# Altium PCB MAINBOARD.PCBDOC
Units mm, origin at the board's own origin, x right, y up, seen from the top; angles counter-clockwise.
Board outline 295.53 x 164.72 mm, 2 copper layers (Top Layer, Bottom Layer); 59 components, 67 nets, 270 pads, 42 vias.
Unrouted connection lines stored in the file: 7.
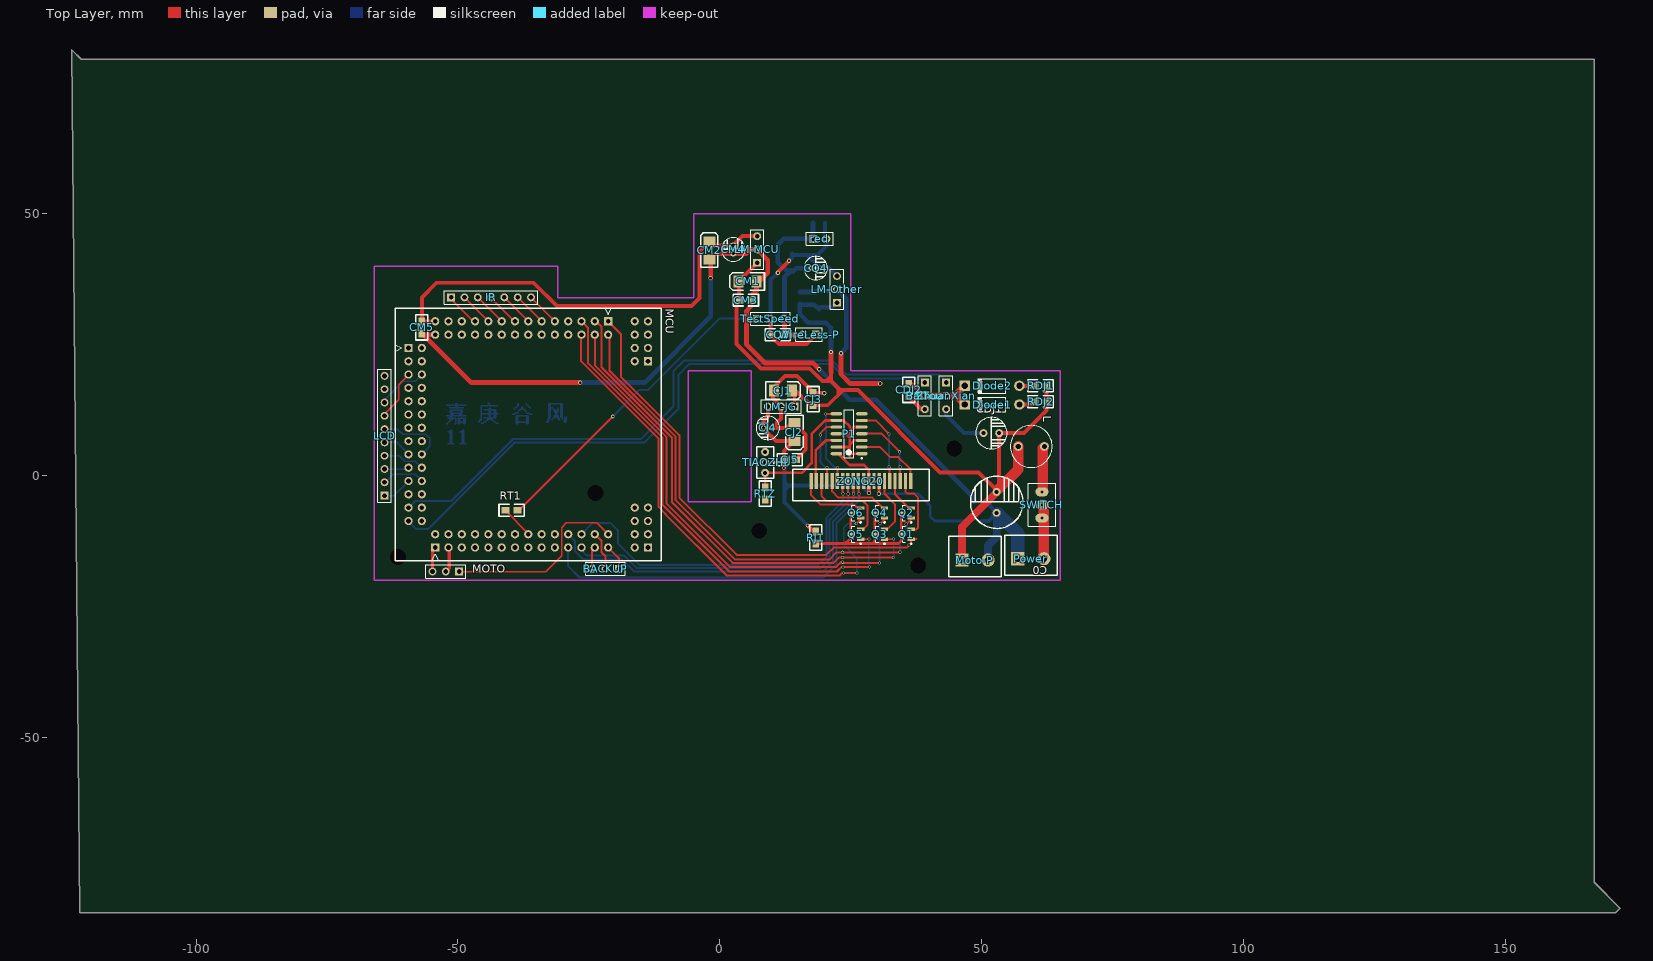
[diagram p0: Top Layer view]
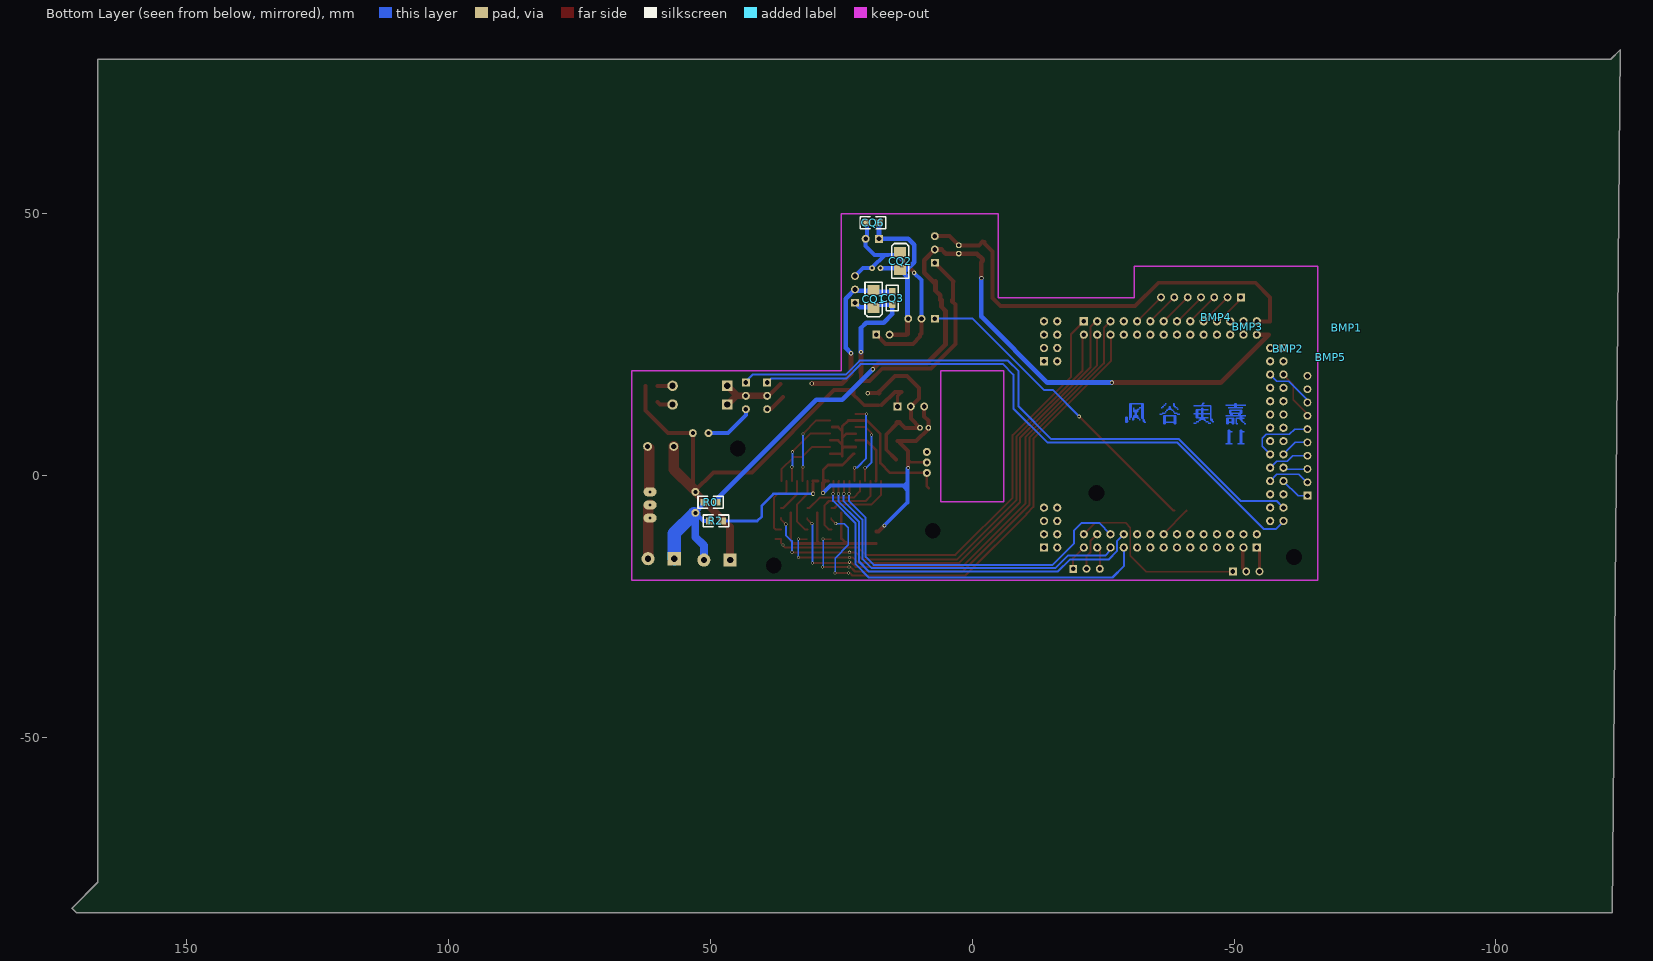
[diagram p1: Bottom Layer view, seen from below]

## Layer stack, top to bottom
Top Layer: signal copper 0.0356
Dielectric: dielectric 0.32, FR-4, Dk 4.8
Bottom Layer: signal copper 0.0356

## Board outline
-122.174,-83.439 170.942,-83.439 171.831,-82.55 166.878,-77.597 166.878,79.502 -121.92,79.502 -123.698,81.28

## Design rules (kind name [scope] priority, off if disabled: settings)
Clearance [All] p1: gap=0.254
ComponentClearance [All] p1 off: gap=0.254 collisioncheckmode=3 verticalgap=0.254
PolygonConnect [All] p1: connectstyle=Relief reliefconductorwidth=0.254 reliefentries=4 polygonreliefangle="90 Angle"
RoutingVias [All] p1: holewidth=0.711 width=1.27 viastyle="Through Hole" minholewidth=0.3 minwidth=0.5 maxholewidth=0.711 maxwidth=1.27
SolderMaskExpansion [All] p1: expansion=0.102
TestPointUsage [All] p1: valid=0 allowmultiple=FALSE
Testpoint [All] p1: side=15 testpointundercomponent=TRUE minsize=1.016 maxsize=2.54 preferedsize=1.524 minholesize=0 maxholesize=1.016 preferedholesize=0.813 testpointgrid=0.025 style=1023 order=0123456789
Width [All] p1: maxlimit=2.5 minlimit=0.254 preferedwidth=0.254 toplayer_prefwidth=0.508 bottomlayer_prefwidth=0.508 minimp=50.000000 maximp=50.000000 favimp=50.000000
18 further rules are at their usual default settings.

## Classes and differential pairs
component class Control: P1 Q1 Q2 Q3 Q4 Q5 Q6 RJ1 RTZ TIAOZHI
component class mainboard: BACKUP BaiTou C0 CDJ1 CDJ2 CJ1 CJ2 CJ3 CJ4 CJ5 CM1 CM2 CM3 CM4 CM5 CQ1 CQ2 CQ3 CQ4 CQ6 CQ7 Diode1 Diode2 IR L LCD LM-JG LM-MCU LM-Other MOTO Moto-P Power R0 R2 RDJ1 RDJ2 red RT1 SWITCH TestSpeed WireLess-P ZhuanXian ZONG20
component class MCU: MCU

## Components (designator, comment, footprint, x,y, rotation, side; value= is the part's Value field where it differs from the comment)
BACKUP "Header 3" HDR1X3 -19.304,-17.78 r180 top
BaiTou "激光摆头舵机接口" HDR1X3 39.116,17.78 r270 top
BMP1 "" BMP1#1 -71.501,28.194 r0 bottom
BMP2 "" BMP1#2 -60.325,24.257 r0 bottom
BMP3 "" BMP1#3 -52.578,28.448 r0 bottom
BMP4 "" BMP1#4 -46.609,30.226 r0 bottom
BMP5 "" BMP1#5 -68.453,22.606 r0 bottom
C0 "BATT" 1000UF 52.832,-5.08 r270 top
CDJ1 "100uF" 100UF 51.816,8.128 r180 top
CDJ2 "Cap" 0805 36.068,15.24 r90 top
CJ1 "Cap Pol3" 3528 13.716,16.256 r0 top
CJ2 "47uF" 3528 14.224,6.604 r270 top
CJ3 "Cap" 0805 17.78,15.748 r270 top
CJ4 "47uF" 47UF 9.144,9.144 r0 top
CJ5 "Cap" 0805 12.192,3.048 r0 top
CM1 "Cap Pol3" 3528 3.556,37.084 r180 top
CM2 "47uF" 3528 -2.032,44.704 r90 top
CM3 "Cap" 0805 6.096,33.528 r180 top
CM4 "47uF" 47UF 2.54,43.18 r270 top
CM5 "Cap" 0805 -56.896,29.464 r270 top
CQ1 "Cap Pol3" 3528 18.796,32.004 r270 bottom
CQ2 "47uF" 3528 13.716,42.672 r90 bottom
CQ3 "Cap" 0805 15.24,35.052 r270 bottom
CQ4 "47uF" 47UF 18.288,39.624 r180 top
CQ6 "Cap" 0805 17.78,48.26 r0 bottom
CQ7 "Cap" 0805 12.192,26.924 r180 top
Diode1 "Diode 1N4001" DO-41 51.943,13.589 r180 top
Diode2 "Diode 1N4001" DO-41 51.943,17.145 r180 top
IR "红外模块接口" HDR1X7 -51.308,34.036 r0 top
L "L 10UH" 10UH 59.436,5.588 r0 top
LCD "LCD显示接口" HDR1X10 -64.008,-3.81 r90 top
LM-JG "激光供电模块" HDR1X3 14.224,13.208 r180 top
LM-MCU "单片机供电模块" HDR1X3 7.112,40.64 r90 top
LM-Other "其他供电模块" HDR1X3 22.352,33.02 r90 top
MCU "龙丘单片机" LQ_112_BOARD -59.436,24.384 r0 top
MOTO "电机模块" HDR1X3 -49.784,-18.288 r180 top
Moto-P "电机电源" tongzhu 43.688,-19.304 r0 top
P1 "Header 7X2A" 74LS04SOP 24.661,8.011 r180 top
Power "电源" tongzhu 54.356,-19.05 r0 top
Q1 "2N3904" 3904 35.56,-11.176 r180 top
Q2 "2N3904" 3904 35.56,-7.112 r180 top
Q3 "2N3904" 3904 30.48,-11.176 r180 top
Q4 "2N3904" 3904 30.48,-7.112 r180 top
Q5 "2N3904" 3904 25.908,-11.176 r180 top
Q6 "2N3904" 3904 25.908,-7.112 r180 top
R0 "0欧姆" 0805 48.768,-5.08 r0 bottom
R2 "0欧姆" 0805 47.752,-8.636 r0 bottom
RDJ1 "6欧姆" 0805 60.071,17.145 r0 top
RDJ2 "6欧姆" 0805 60.071,14.097 r0 top
red "Header 2" HDR1X2 17.78,45.212 r0 top
RJ1 "Res1" 0805 18.288,-10.668 r270 top
RT1 "测速电阻" 0805 -38.608,-6.604 r180 top
RTZ "TIAO" 0805 8.636,-4.572 r90 top
SWITCH "SWITCH" SWITCH 61.468,-5.588 r90 top
TestSpeed "测速模块" HDR1X3 7.112,29.972 r0 top
TIAOZHI "Header 3" TIAOZHI 8.636,2.54 r90 top
WireLess-P "无线电源模块" HDR1X2 18.288,26.924 r180 top
ZhuanXian "摆角舵机" HDR1X3 43.18,17.78 r270 top
ZONG20 "Header 20" ZONG20 26.416,-1.016 r0 top

## Footprints (in the part's own frame and the unit in brackets; to place one, negate y for a bottom-side part, rotate by r counter-clockwise, add the part's x,y. Pads: shape width x height; smd on the part's side, far side on the other; paste and mask are expansions set on the pad)
10UH [mm]
  round 1.7 hole 1: 1(-2.5,0) 2(2.5,0)
  silkscreen extent -4,-4 4,4
47UF [mm]
  round 1.1 hole 0.6: 1(-0.8,0) 2(0.8,0)
  silkscreen extent -2.25,-2.25 2.25,2.25
74LS04SOP [mm]
  oval 2.2x0.6 smd: 1(-2.425,3.81) 2(-2.425,2.54) 3(-2.425,1.27) 4(-2.425,0) 5(-2.425,-1.27) 6(-2.425,-2.54) 7(-2.425,-3.81) 8(2.425,-3.81) 9(2.425,-2.54) 10(2.425,-1.27) 11(2.425,0) 12(2.425,1.27) 13(2.425,2.54) 14(2.425,3.81)
  silkscreen extent -2.55,-4.55 0.93,4.78
100UF [mil]
  round 60 hole 30: 1(-59.06,0) 2(59.06,0)
  silkscreen extent -118,-118 118,118
0805 [mil]
  rect 60x50 smd: 1(0,0) 2(90,0)
  silkscreen extent -50,-45 140,45
1000UF [mil]
  round 60 hole 30: 1(-78.74,0) 2(78.74,0)
  silkscreen extent -197,-197 197,197
3528 [mil]
  rect 75x90 smd: 1(0,0) 2(-135,0)
  silkscreen extent -195,-65 65,65
3904 [mm] "SOT23, 3-Leads, Body 3.0x2.5mm (max), Pitch 0.95mm, IPC Medium Density"
  rect 1.4x0.6 smd: 1(-0.95,-0.95) 2(-0.95,0.95) 3(0.95,0)
  silkscreen extent -1.08,-1.5 0.7,1.92
BMP1#1 [mm]
  Top Layer lines w0.254: 19.304,18.288 19.558,18.288 ; 19.304,16.764 23.114,16.764 ; 19.304,14.732 23.114,14.732 ; 19.558,18.034 19.812,18.034 ; 19.558,17.272 21.082,17.272 21.082,18.288 20.828,18.288 ; 19.812,17.78 20.066,17.78 20.066,16.764 ; 19.812,15.24 22.606,15.24 ; 20.066,17.526 20.32,17.526 20.32,15.748 ; 20.066,17.018 20.32,17.018 ; 20.066,16.002 20.32,16.002 ; 20.32,16.51 20.574,16.51 ; 20.574,16.764 20.574,16.256 ; 21.082,15.24 21.082,14.478 21.336,14.478 21.336,15.24 ; 21.082,14.986 21.336,14.986 ; 21.59,18.034 22.86,18.034 ; 21.59,17.78 21.844,17.78 ; 21.59,17.526 21.844,17.526 ; 21.844,17.272 21.844,18.288 21.59,18.288 21.59,17.272 22.86,17.272 22.86,18.288 22.606,18.288 22.606,17.272 ; 21.844,16.764 21.844,16.256 ; 21.844,16.51 22.098,16.51 ; 22.098,16.764 22.098,15.748 ; 22.098,16.002 22.352,16.002 ; 22.606,17.78 22.86,17.78 ; 22.606,17.526 22.86,17.526 ; 20.066,16.256 20.066,15.748 22.352,15.748 22.352,16.256 20.066,16.256
BMP1#2 [mm]
  Top Layer lines w0.254: 14.224,13.97 14.478,13.97 14.478,13.462 14.732,13.462 ; 14.478,13.716 14.732,13.716 14.732,10.922 18.034,10.922 ; 14.732,14.224 15.24,14.224 ; 14.732,12.446 18.034,12.446 ; 15.24,13.97 15.748,13.97 ; 15.24,13.208 17.526,13.208 17.526,11.684 15.24,11.684 ; 15.748,13.716 16.002,13.716 16.002,13.208 ; 16.002,13.462 16.764,13.462 ; 16.002,10.414 16.256,10.414 16.256,10.922 ; 16.256,13.462 16.256,11.43 16.51,11.43 16.51,13.462 ; 16.256,12.954 16.51,12.954 ; 16.256,12.7 16.51,12.7 ; 16.256,12.192 16.51,12.192 ; 16.256,11.938 16.51,11.938 ; 16.256,10.668 16.51,10.668 ; 16.764,13.208 16.764,13.716 17.018,13.716 ; 17.018,13.97 17.526,13.97 ; 17.272,13.208 17.272,11.684 ; 17.272,12.954 17.526,12.954 ; 17.272,12.7 17.526,12.7 ; 17.272,12.192 17.526,12.192 ; 17.272,11.938 17.526,11.938 ; 17.526,14.224 18.034,14.224
BMP1#3 [mm]
  Top Layer lines w0.254: 12.954,16.764 13.462,16.764 ; 13.208,15.748 13.462,15.748 ; 13.462,16.51 13.97,16.51 ; 13.462,15.494 13.716,15.494 ; 13.716,18.288 16.002,18.288 ; 13.716,18.034 13.97,18.034 ; 13.716,17.78 13.97,17.78 ; 13.716,17.526 13.97,17.526 ; 13.716,17.272 13.97,17.272 ; 13.716,15.24 13.97,15.24 13.97,14.732 14.224,14.732 ; 13.97,17.018 13.97,18.542 13.716,18.542 13.716,17.018 16.002,17.018 16.002,18.542 15.748,18.542 15.748,17.018 ; 13.97,16.256 14.224,16.256 ; 13.97,14.986 14.224,14.986 ; 14.224,16.002 14.478,16.002 ; 14.478,15.748 15.24,15.748 ; 14.732,15.748 14.732,15.24 14.986,15.24 14.986,15.748 ; 14.732,15.494 14.986,15.494 ; 15.24,16.002 15.494,16.002 ; 15.494,16.256 15.748,16.256 ; 15.494,14.732 15.748,14.732 ; 15.748,18.034 16.002,18.034 ; 15.748,17.78 16.002,17.78 ; 15.748,17.526 16.002,17.526 ; 15.748,17.272 16.002,17.272 ; 15.748,16.51 16.256,16.51 ; 15.748,14.986 16.002,14.986 ; 16.002,15.24 16.256,15.24 ; 16.256,16.764 16.764,16.764 ; 16.256,15.494 16.51,15.494
BMP1#4 [mm]
  Top Layer lines w0.254: 13.462,20.066 13.716,20.066 13.716,19.558 13.97,19.558 ; 13.716,19.812 13.97,19.812 13.97,16.51 16.51,16.51 16.51,19.558 ; 13.97,19.304 14.224,19.304 14.224,16.51 ; 13.97,19.05 14.224,19.05 ; 13.97,18.796 14.224,18.796 ; 13.97,18.542 14.224,18.542 ; 13.97,18.288 14.224,18.288 ; 13.97,18.034 14.224,18.034 ; 13.97,17.78 14.224,17.78 ; 13.97,17.526 14.224,17.526 ; 13.97,17.272 14.732,17.272 ; 13.97,17.018 14.224,17.018 ; 13.97,16.764 14.224,16.764 ; 14.478,19.558 14.732,19.558 ; 14.732,19.304 14.986,19.304 14.986,18.796 15.748,18.796 15.748,19.558 16.002,19.558 ; 14.732,17.526 14.986,17.526 14.986,18.034 15.748,18.034 15.748,17.272 ; 14.986,19.05 15.748,19.05 ; 14.986,17.78 15.748,17.78 ; 15.24,19.05 15.24,17.78 ; 15.24,18.542 15.494,18.542 ; 15.24,18.288 15.494,18.288 ; 15.494,19.05 15.494,17.78 ; 15.748,19.304 16.002,19.304 ; 16.256,18.796 16.51,18.796 ; 16.256,18.542 16.51,18.542 ; 16.256,18.288 16.51,18.288 ; 16.256,18.034 16.51,18.034 ; 16.256,17.78 16.51,17.78 ; 16.256,17.526 16.51,17.526 ; 16.256,17.272 16.51,17.272 ; 16.256,17.018 16.51,17.018 ; 16.256,16.764 16.51,16.764 ; 16.256,16.51 16.256,19.05 16.51,19.05 ; 16.764,19.812 17.272,19.812 ; 17.018,19.558 17.272,19.558 ; 17.018,19.304 17.272,19.304 ; 17.018,20.066 17.272,20.066 17.272,19.05 17.018,19.05 17.018,20.066
BMP1#5 [mm]
  Top Layer lines w0.254: 16.51,16.51 17.78,16.51 ; 16.51,14.224 17.272,14.224 ; 17.018,16.51 17.018,13.97 17.272,13.97 17.272,16.51 ; 17.018,16.256 17.272,16.256 ; 17.018,16.002 17.272,16.002 ; 17.018,15.748 17.272,15.748 ; 17.018,15.494 17.272,15.494 ; 17.018,15.24 17.272,15.24 ; 17.018,14.986 17.272,14.986 ; 17.018,14.732 17.272,14.732 ; 17.018,14.478 17.272,14.478 ; 18.796,16.51 20.066,16.51 ; 18.796,14.224 19.558,14.224 ; 19.304,16.51 19.304,13.97 19.558,13.97 19.558,16.51 ; 19.304,16.256 19.558,16.256 ; 19.304,16.002 19.558,16.002 ; 19.304,15.748 19.558,15.748 ; 19.304,15.494 19.558,15.494 ; 19.304,15.24 19.558,15.24 ; 19.304,14.986 19.558,14.986 ; 19.304,14.732 19.558,14.732 ; 19.304,14.478 19.558,14.478
DO-41 [mm] "Diode, Axial; Body 5.2 x 2.7 mm (LxDia. max), Lead Dia. 0.86 mm (max)"
  round 2 hole 1.2: 1(-5.23,0)
  rect 2x2 hole 1.2: 2(5.23,0)
  silkscreen extent -2.65,-1.42 2.75,1.4
HDR1X2 [mm] "Connector; Header; 2 Position"
  rect 1.5x1.5 hole 0.9: 1(0,0)
  round 1.5 hole 0.9: 2(2.54,0)
  silkscreen extent -1.27,-1.27 3.81,1.27
HDR1X3 [mm] "Connector; Header; 3 Position"
  rect 1.5x1.5 hole 0.9: 1(0,0)
  round 1.5 hole 0.9: 2(2.54,0) 3(5.08,0)
  silkscreen extent -1.27,-1.27 6.35,1.27
HDR1X7 [mm] "Connector; Header; 7 Position"
  rect 1.5x1.5 hole 0.9: 1(0,0)
  round 1.5 hole 0.9: 2(2.54,0) 3(5.08,0) 4(7.62,0) 5(10.16,0) 6(12.7,0) 7(15.24,0)
  silkscreen extent -1.27,-1.27 16.51,1.27
HDR1X10 [mm] "Connector; Header; 10 Position"
  rect 1.5x1.5 hole 0.9: 1(0,0)
  round 1.5 hole 0.9: 2(2.54,0) 3(5.08,0) 4(7.62,0) 5(10.16,0) 6(12.7,0) 7(15.24,0) 8(17.78,0) 9(20.32,0) 10(22.86,0)
  silkscreen extent -1.27,-1.27 24.13,1.27
LQ_112_BOARD [mil]
  rect 62x62 hole 35: 101(200,-1500) 201(0,0) 301(1500,200) 401(1800,-1500) 501(1800,-100)
  round 62 hole 35: 102(200,-1400) 103(300,-1500) 104(300,-1400) 105(400,-1500) 106(400,-1400) 107(500,-1500) 108(500,-1400) 109(600,-1500) 110(600,-1400) 111(700,-1500) 112(700,-1400) 113(800,-1500) 114(800,-1400) 115(900,-1500) 116(900,-1400) 117(1000,-1500) 118(1000,-1400) 119(1100,-1500) 120(1100,-1400) 121(1200,-1500) 122(1200,-1400) 123(1300,-1500) 124(1300,-1400) 125(1400,-1500) 126(1400,-1400) 127(1500,-1500) 128(1500,-1400) 202(100,0) 203(0,-100) 204(100,-100) 205(0,-200) 206(100,-200) 207(0,-300) 208(100,-300) 209(0,-400) 210(100,-400) 211(0,-500) 212(100,-500) 213(0,-600) 214(100,-600) 215(0,-700) 216(100,-700) 217(0,-800) 218(100,-800) 219(0,-900) 220(100,-900) 221(0,-1000) 222(100,-1000) 223(0,-1100) 224(100,-1100) 225(0,-1200) 226(100,-1200) 227(0,-1300) 228(100,-1300) 302(1500,100) 303(1400,200) 304(1400,100) 305(1300,200) 306(1300,100) 307(1200,200) 308(1200,100) 309(1100,200) 310(1100,100) 311(1000,200) 312(1000,100) 313(900,200) 314(900,100) 315(800,200) 316(800,100) 317(700,200) 318(700,100) 319(600,200) 320(600,100) 321(500,200) 322(500,100) 323(400,200) 324(400,100) 325(300,200) 326(300,100) 327(200,200) 328(200,100) 402(1700,-1500) 403(1800,-1400) 404(1700,-1400) 405(1800,-1300) 406(1700,-1300) 407(1800,-1200) 408(1700,-1200) 502(1700,-100) 503(1800,0) 504(1700,0) 505(1800,100) 506(1700,100) 507(1800,200) 508(1700,200)
  silkscreen extent -100,-1600 1900,300
SWITCH [mm]
  oval 1.7x2.5 hole 0.6: 1(-2.5,0) 2(0,0) 3(2.5,0)
  silkscreen extent -4.1,-2.6 4.1,2.6
TIAOZHI [mil]
  round 60 hole 30: 1(-78.74,0) 2(0,0) 3(78.74,0)
  silkscreen extent -118,-65 118,65
tongzhu [mm]
  rect 2.5x2.5 hole 1.2: 1(2.5,3.2)
  round 2.5 hole 1.2: 2(7.5,3.2)
  silkscreen extent 0,0 10,7.7
ZONG20 [mm]
  rect 0.65x3 smd: 1(-9,0) 2(-8,0) 3(-7,0) 4(-6,0) 5(-5,0) 6(-4,0) 7(-3,0) 8(-2,0) 9(-1,0) 10(0,0) 11(1,0) 12(2,0) 13(3,0) 14(4,0) 15(5,0) 16(6,0) 17(7,0) 18(8,0) 19(9,0) 20(10,0)
  silkscreen extent -12.5,-3.8 13.5,2.2

## Part data
BACKUP: "备用"
BaiTou LM-JG LM-MCU LM-Other MOTO SWITCH TestSpeed ZhuanXian: library part "Header 3", "Header, 3-Pin"
C0: library part "Cap Pol3", "Polarized Capacitor (Surface Mount)"
CDJ1 CJ2 CM2 CQ2: library part "Cap Pol1", "Polarized Capacitor (Radial)"
CDJ2 CJ3 CJ5 CM3 CM5 CQ3 CQ6 CQ7: "Capacitor"
CJ1 CM1 CQ1: "Polarized Capacitor (Surface Mount)"
CJ4 CM4 CQ4: library part Cap, "Capacitor"
Diode1 Diode2: "1 Amp General Purpose Rectifier"
IR: library part "Header 9", "Header, 9-Pin"
L: library part Res3, "Resistor"
LCD: library part "Header 10", "Header, 10-Pin"
MCU: library part LQ_112_BOARD, "LQ_112_BOARD"
Moto-P Power WireLess-P: library part "Header 2", "Header, 2-Pin"
P1: "Header, 7-Pin, Dual row"
Q1 Q2 Q3 Q4 Q5 Q6: "NPN General Purpose Amplifier"
R0 R2 RDJ1 RDJ2 RT1 RTZ: library part Res2, "Resistor"
red: "Header, 2-Pin"
RJ1: "Resistor"
TIAOZHI: "Header, 3-Pin"
ZONG20: "传感下来引脚"

## Free pads (board coordinates)
  round 0 hole 3: 0(-61.468,-15.52) 1(-23.749,-3.302) 2(37.84,-17.145) 3(7.493,-10.52) 4(44.704,5.207)

## Via types
v1: diameter 0.6, hole 0.4, Top Layer to Bottom Layer, 28 vias
v2: diameter 0.8, hole 0.5, Top Layer to Bottom Layer, 7 vias
v3: diameter 0.8, hole 0.4, Top Layer to Bottom Layer, 4 vias
v4: diameter 0.7, hole 0.4, Top Layer to Bottom Layer, 3 vias

## Nets (pads, with @x,y where several pads share a name; then routed paths per layer and width w, separated by ;. In a path a pad name is that pad's centre, name@x,y a point inside that pad or via, vN(x,y) a via of type N, cw(c..) or ccw(c..) an arc to the next point about the centre after c; other vN are vias at no path point)
0: IR.7 MCU.309 | length 6.5
  Top Layer w0.381: IR.7 MCU.309
1: IR.6 MCU.311 | length 6.5
  Top Layer w0.381: IR.6 MCU.311
2: IR.5 MCU.313 | length 6.6
  Top Layer w0.381: IR.5@-41.275,34.163 MCU.313
3: IR.4 MCU.315 | length 6.4
  Top Layer w0.381: IR.4@-43.688,33.909 -39.243,29.464 MCU.315
4: IR.3 MCU.317 | length 6.5
  Top Layer w0.381: IR.3 MCU.317
5: IR.2 MCU.319 | length 6.3
  Top Layer w0.381: IR.2 MCU.319@-44.323,29.591
6: IR.1 MCU.321 | length 6.3
  Top Layer w0.381: IR.1@-51.308,33.655 -47.117,29.464 MCU.321
8: MCU.310
9: MCU.312
10: MCU.314
11: MCU.316
A0: MCU.301 Q1.2 | length 91.1
  Top Layer w0.381: MCU.301@-21.463,29.591 -18.923,27.051 -18.923,18.923 -7.747,7.747 -7.747,-4.191 3.175,-15.113 20.32,-15.113 21.717,-13.716 35.687,-13.716 36.068,-13.335 v1(36.068,-13.208) 36.51,-12.766 Q1.2 37.531,-12.126
  Bottom Layer w0.381: MCU.301@-21.59,29.591 MCU.301@-21.463,29.591
A1: MCU.302 Q2.2 | length 92.4
  Top Layer w0.381: MCU.302 -21.082,26.67 -21.082,20.066 -8.509,7.493 -8.509,-4.572 2.921,-16.002 20.828,-16.002 22.205,-14.625 v1(23.368,-14.625) ; v1@23.378,-14.615 v1(34.407,-14.615) ; v1(35.56,-9.271) 36.51,-8.321 Q2.2
  Bottom Layer w0.381: v1@34.417,-14.605 34.417,-12.512 35.56,-11.369 v1(35.56,-9.271)
A2: MCU.303 Q3.2 | length 93.8
  Top Layer w0.254: Q3.2 33.086,-12.126 v1(33.147,-12.065)
  Top Layer w0.381: MCU.303@-23.622,29.464 -22.606,28.448 -22.606,20.692 -9.144,7.23 -9.144,-5.08 2.413,-16.637 21.717,-16.637 22.713,-15.641 v1(23.368,-15.641) ; v1@23.378,-15.631 v1(33.137,-15.631)
  Bottom Layer w0.254: MCU.303 MCU.303@-23.622,29.464 ; v1@33.147,-15.621 v1(33.147,-12.065)
  Bottom Layer w0.381: MCU.303@-23.876,29.21 MCU.303
A3: MCU.304 Q4.2 | length 93
  Top Layer w0.254: v1(30.607,-9.144) 31.43,-8.321 Q4.2
  Top Layer w0.381: MCU.304 -23.876,21.064 -10.16,7.348 -10.16,-5.334 1.905,-17.399 22.225,-17.399 23.114,-16.51 v1(23.368,-16.51) 23.495,-16.637 v1(30.48,-16.637)
  Bottom Layer w0.381: v1(30.48,-16.637) 30.48,-9.271 v1(30.607,-9.144)
A4: MCU.305 Q5.2 | length 93.7
  Top Layer w0.254: Q5.2 28.387,-12.126 v1(28.448,-12.065)
  Top Layer w0.381: MCU.305 -25.146,28.194 -25.146,21.436 -10.922,7.212 -10.922,-5.588 1.778,-18.288 22.352,-18.288 23.231,-17.409 v1(28.565,-17.409)
  Bottom Layer w0.254: MCU.305@-26.67,29.591 MCU.305@-26.543,29.591 ; v1(28.448,-12.065) 28.448,-17.272 v1@28.575,-17.399
  other v1: 23.495,-17.419
A5: MCU.306 Q6.2 | length 96.7
  Top Layer w0.254: v1(26.035,-9.144) 26.858,-8.321 Q6.2
  Top Layer w0.381: MCU.306@-26.543,27.178 -26.543,21.935 -11.684,7.076 -11.684,-5.969 -10.414,-7.239 -10.414,-7.366 1.27,-19.05 22.86,-19.05 23.358,-18.552 v1(26.152,-18.552)
  Bottom Layer w0.254: v1(26.035,-9.144) 24.384,-9.144 23.622,-9.906 23.622,-13.208 26.162,-15.748 v1@26.162,-18.542
  other v1: 23.612,-18.552
A6: MCU.307
A7: MCU.308
ALLVCC: C0.1 CDJ1.1 CJ1.1 CJ3.2 CM1.1 CM3.2 CQ1.1 CQ3.2 L.1 LM-JG.1 LM-MCU.1 LM-Other.1 Moto-P.1 RDJ1.2 RDJ2.2 | length 174.2
  Top Layer w0.635: CJ1.1@13.462,16.002 14.224,15.24 LM-JG.1 ; CJ3.2 20.574,13.462 22.096,14.984 22.164,14.984 23.495,16.315 ; 22.606,15.494 22.606,16.387
  Top Layer w0.762: CM1.1 LM-MCU.1@6.985,40.513 ; CM3.2@3.683,33.274 CM1.1@3.683,36.957 ; CM3.2 3.81,33.274 3.175,32.639 3.175,25.146 7.874,20.447 17.145,20.447 19.558,18.034 21.209,18.034 ; CJ1.1@13.462,16.002 14.732,16.002 CJ3.2@17.272,13.462 ; 20.574,18.288 21.209,18.923 ; 21.209,20.447 21.209,18.034 ; 52.451,-2.413 52.578,-2.286 ; C0.1@53.086,-3.048 49.403,0.635 42.037,0.635 26.357,16.315 22.928,16.315 21.209,18.034 ; C0.1@53.316,-2.596 CDJ1.1 58.039,8.128 62.357,12.446 RDJ1.2
  Top Layer w0.889: 21.209,19.65 v3(21.209,23.622)
  Top Layer w1.5: Moto-P.1 46.188,-9.819 C0.1@52.832,-3.175
  Top Layer w2: 53.316,-2.437 56.936,1.183 L.1
  Bottom Layer w0.889: CQ3.2 15.24,30.861 16.891,29.21 20.193,29.21 21.209,28.194 v3(21.209,23.622) ; CQ3.2@15.494,32.639 18.034,32.639 CQ1.1@18.923,31.75 ; CQ1.1@19.304,32.131 21.463,32.131 LM-Other.1
AVCC: L.2 SWITCH.3 | length 8.2
  Top Layer w2: SWITCH.3@61.595,-2.921 L.2@61.595,5.247
B0: MCU.121 ZONG20.10 | length 74.4
  Top Layer w0.254: v1@26.416,-3.322 v1(26.533,-3.439)
  Top Layer w0.381: v1@26.416,-3.322 ZONG20.10
  Bottom Layer w0.381: MCU.121 -28.956,-17.272 -26.799,-19.429 19.687,-19.429 22.225,-16.891 22.225,-9.128 26.533,-4.821 v1(26.533,-3.439)
B1: MCU.122 ZONG20.9 | length 72.4
  Top Layer w0.381: ZONG20.9 25.517,-1.117 v1(25.517,-3.439)
  Bottom Layer w0.381: MCU.122 -27.686,-12.446 -27.686,-14.351 -26.035,-16.002 -18.669,-16.002 -16.383,-18.288 19.685,-18.288 21.59,-16.383 21.59,-8.763 25.517,-4.836 v1(25.517,-3.439)
B2: MCU.123 ZONG20.8 | length 66.3
  Top Layer w0.381: v1@24.416,-3.354 ZONG20.8
  Bottom Layer w0.381: MCU.123 -26.416,-14.224 -25.4,-15.24 -18.288,-15.24 -15.875,-17.653 19.177,-17.653 20.955,-15.875 20.955,-8.382 24.501,-4.836 v1(24.501,-3.439)
B3: MCU.124 ZONG20.7 | length 68.8
  Top Layer w0.381: ZONG20.7 23.416,-3.37 v1(23.485,-3.439)
  Bottom Layer w0.381: MCU.124 -24.257,-9.017 -20.955,-9.017 -19.431,-10.541 -19.431,-12.954 -15.367,-17.018 18.796,-17.018 20.32,-15.494 20.32,-8.001 23.485,-4.836 v1(23.485,-3.439)
B4: BACKUP.3 MCU.125 | length 4.3
  Top Layer w0.381: BACKUP.3 -24.384,-14.224 MCU.125
B5: BACKUP.2 MCU.126 | length 7.7
  Top Layer w0.381: MCU.126 -22.606,-12.446 -22.606,-14.605 -21.844,-15.367 BACKUP.2@-21.844,-18.034
B6: BACKUP.1 MCU.127 | length 4.9
  Top Layer w0.381: MCU.127 -19.304,-15.748 BACKUP.1
B7: MCU.128 MOTO.1 | length 36.3
  Top Layer w0.254: MOTO.1 -33.274,-18.288 -30.226,-15.24 -30.226,-9.906 -29.337,-9.017 -23.495,-9.017 MCU.128
DJVCC: BaiTou.2 CDJ2.2 Diode1.2 Diode2.2 ZhuanXian.2 | length 14.4
  Top Layer w0.762: CDJ2.2@36.576,17.526 38.862,15.24 BaiTou.2
  Top Layer w1.27: BaiTou.2 45.062,15.24 ; Diode1.2 45.062,15.24 ; Diode2.2 45.062,15.494 45.062,15.24
GND: BaiTou.3 C0.2 CDJ1.2 CDJ2.1 CQ1.2 CQ2.2 CQ3.1 CQ4.2 CQ6.1 CQ7.1 LM-Other.2 Moto-P.2 Power.1 R0.2 R2.2 red.1 TestSpeed.3 WireLess-P.2 ZhuanXian.3 | length 109.9
  Top Layer w0.762: CDJ2.1@36.068,14.986 38.354,12.7 BaiTou.3
  Top Layer w0.889: CQ7.1@12.319,27.051 TestSpeed.3@12.319,30.099 ; CQ7.1@12.319,27.178 12.573,26.924 WireLess-P.2 ; v3(23.114,23.368) 23.114,19.362 24.886,17.59 v2(30.607,17.59)
  Bottom Layer w0.762: ZhuanXian.3 43.18,11.557 46.609,8.128 CDJ1.2 ; R2.2 51.276,-8.636 C0.2 R0.2@51.271,-5.519 ; R0.2@51.382,-5.408 R0.2@51.562,-5.588
  Bottom Layer w0.889: TestSpeed.3@12.319,29.845 12.319,37.846 CQ2.2 ; CQ2.2@13.208,38.989 CQ2.2@13.208,39.243 ; CQ2.2@13.589,38.989 12.827,38.989 11.049,40.767 11.049,44.069 12.192,45.212 red.1 CQ6.1 ; CQ2.2@13.97,38.989 14.605,39.624 CQ4.2 ; CQ3.1 18.415,35.052 CQ1.2 ; CQ1.2@18.923,35.306 22.098,35.306 LM-Other.2 24.13,33.782 24.13,24.384 v3(23.114,23.368) ; R0.2@51.382,-5.408 R0.2@51.382,-5.281
  Bottom Layer w1.5: Moto-P.2 51.188,-13.328 52.832,-11.684 C0.2
  Bottom Layer w2.5: C0.2@53.086,-7.239 56.856,-11.009 Power.1
I1: P1.2 ZONG20.20 | length 13.3
  Top Layer w0.381: P1.2 30.597,5.471 32.512,3.556 34.077,3.556 36.416,1.217 ZONG20.20
I2: P1.4 ZONG20.18 | length 14.1
  Top Layer w0.381: P1.4 30.851,8.011 v1@34.29,4.572 ; ZONG20.18 v1(34.417,1.651) v1(34.417,1.651)
  Bottom Layer w0.381: v1@34.29,1.778 v1@34.29,4.572
  other v1: 34.28,4.562
I3: P1.6 ZONG20.16 | length 15.3
  Top Layer w0.381: P1.6 29.708,10.551 v1@32.258,8.001 ; v1(32.258,1.651) 32.416,1.493 ZONG20.16
  Bottom Layer w0.381: v1(32.258,1.651) v1@32.258,8.001
  other v1: 32.248,7.991
I4: P1.8 ZONG20.6 | length 16.1
  Top Layer w0.381: v1@20.203,11.821 P1.8 ; ZONG20.6 22.416,1.461 v1(22.469,1.514)
  Bottom Layer w0.381: v1@20.203,11.801 20.203,3.292 21.971,1.524 v1@22.469,1.524
  other v1: 20.183,11.801
I5: P1.10 ZONG20.4 | length 13.4
  Top Layer w0.381: v1(19.177,7.747) 19.177,8.128 20.33,9.281 P1.10 ; ZONG20.4 20.416,1.493 v1@20.447,1.524
  Bottom Layer w0.381: v1(19.177,7.747) 19.177,2.54 20.193,1.524 v1@20.447,1.524
  other v1: 20.437,1.514
I6: P1.12 ZONG20.2 | length 10.6
  Top Layer w0.508: ZONG20.2 18.288,-0.888 18.288,4.826 20.203,6.741 P1.12
IN: P1.1 P1.3 P1.5 P1.9 P1.11 P1.13 RTZ.2 TIAOZHI.1 | length 45.7
  Top Layer w0.508: RTZ.2@8.255,-2.413 8.636,-2.032 TIAOZHI.1 15.653,0.54 17.526,2.413 17.526,8.001 20.066,10.541 23.599,10.541 ; P1.13 24.407,5.471 24.788,5.09 ; P1.11 23.993,8.011 24.788,7.216 ; 23.609,10.551 24.788,9.372 24.788,3.715 ; 24.788,3.947 25.042,4.201 P1.1 ; 24.788,5.943 25.586,6.741 P1.3 ; 24.788,8.519 25.55,9.281 P1.5@26.693,9.281
INVCC: Power.2 SWITCH.1 SWITCH.2 | length 10.4
  Top Layer w2: SWITCH.2 61.856,-5.976 Power.2
JGND: CJ1.2 CJ2.2 CJ3.1 CJ4.2 CJ5.2 LM-JG.2 P1.7 R2.1 RTZ.1 ZONG20.13 ZONG20.14 | length 58.4
  Top Layer w0.508: ZONG20.13 ZONG20.14 ; v2(30.353,-3.429) ZONG20.14@30.353,-1.524
  Top Layer w0.762: CJ2.2@13.843,10.16 12.827,9.144 CJ4.2 11.684,10.884 LM-JG.2 10.16,14.732 10.16,16.764 12.446,19.05 14.732,19.05 CJ3.1@17.78,16.002 ; CJ2.2 16.383,7.874 16.383,4.953 CJ5.2 ; CJ3.1 v2@19.899,15.748
  Top Layer w0.889: CJ2.2@13.843,10.16 CJ2.2@14.351,10.16 ; CJ3.1 CJ3.1@17.78,16.002
  Bottom Layer w0.508: v2(30.353,-3.429) 37.973,-3.429 37.973,-3.556 40.132,-5.715 40.132,-7.747 41.021,-8.636 R2.1
  other v2: 19.919,15.728
JVCC: CJ2.1 CJ4.1 CJ5.1 LM-JG.3 P1.14 RJ1.1 TIAOZHI.2 ZONG20.11 ZONG20.12 | length 66.5
  Top Layer w0.508: TIAOZHI.2 11.684,2.54 CJ5.1 ; P1.14@22.479,4.191 22.606,4.191 24.765,2.032 27.473,2.032 28.416,1.089 ZONG20.12 ZONG20.11
  Top Layer w0.762: LM-JG.3 9.144,11.303 8.344,10.503 8.344,8.928 10.668,6.604 CJ2.1 ; v4(12.192,1.504) 12.192,4.699 13.716,6.223 CJ2.1@13.716,6.35 ; v4(16.754,-9.535) 17.887,-10.668 RJ1.1 ; 28.067,-1.016 28.448,-1.397 v2(28.448,-3.302)
  Bottom Layer w0.762: v4(12.192,1.504) 12.309,1.387 12.309,-5.07 v4@16.764,-9.525 ; 12.309,-2.794 12.944,-2.159 12.944,-1.905 ; 12.309,-1.27 12.944,-1.905 ; v2(28.448,-3.302) 27.051,-1.905 12.944,-1.905
M0: LCD.1 MCU.221 | length 5.7
  Bottom Layer w0.254: LCD.1 -62.23,-3.81 MCU.221
M1: LCD.2 MCU.222 | length 8.5
  Bottom Layer w0.254: LCD.2@-64.262,-1.27 -63.881,-1.27 -62.357,0.254 -58.166,0.254 MCU.222
M2: LCD.3 MCU.219 | length 4.7
  Bottom Layer w0.254: LCD.3 -59.69,1.27 MCU.219
M3: LCD.4 MCU.220 | length 8.1
  Bottom Layer w0.254: LCD.4 -61.214,3.81 -60.198,2.794 -58.166,2.794 MCU.220
M4: LCD.5 MCU.217 | length 5.5
  Bottom Layer w0.254: LCD.5 -61.722,6.35 MCU.217
M5: LCD.6 MCU.218 | length 13.1
  Bottom Layer w0.254: LCD.6 -61.595,8.89 -60.579,7.874 -56.134,7.874 -55.372,7.112 -55.372,5.588 MCU.218
M6: LCD.7 MCU.205 | length 9.8
  Top Layer w0.254: LCD.7 -64.008,11.811 -61.341,14.478 -61.341,17.399 MCU.205
M7: LCD.8 MCU.206 | length 9.6
  Bottom Layer w0.254: LCD.8 -64.008,14.478 -60.452,18.034 -58.166,18.034 MCU.206
MGND: CM1.2 CM2.2 CM3.1 CM4.2 CM5.2 LM-MCU.2 MCU.328 R0.1 | length 163.9
  Top Layer w0.889: MCU.328 -56.642,26.924 -47.498,17.78 v2@-26.69,17.78 ; CM2.2@-2.032,41.021 -1.778,40.767 v2@-1.778,37.719 ; CM2.2 -0.927,42.38 5.042,42.38 5.842,43.18 LM-MCU.2 9.144,41.148 9.144,38.735 7.112,36.703 CM1.2@6.985,36.703 ; CM3.1@5.842,33.528 5.842,32.258 5.08,31.496 5.08,25.019 8.572,21.526 17.716,21.526 v2(18.938,20.305) ; CM3.1 6.096,34.417 6.985,35.306 CM1.2
  Bottom Layer w0.889: v2@-26.69,17.78 -14.351,17.78 -1.905,30.226 ; -1.778,30.353 v2@-1.778,37.719 ; v2(18.938,20.305) 24.765,14.478 29.718,14.478 48.514,-4.318 R0.1@48.514,-4.953
  other v2: -26.68,17.77 -1.788,37.709
MVCC: CM2.1 CM4.1 CM5.1 LM-MCU.3 MCU.327 | length 85.2
  Top Layer w0.762: MCU.327 CM5.1 -56.896,34.036 -54.102,36.83 -35.56,36.83 -31.115,32.385 -5.461,32.385 -3.937,33.909 -3.937,42.799 -2.413,44.323 CM2.1@-2.413,44.577 ; CM2.1 -1.308,43.98 CM4.1 4.28,45.72 LM-MCU.3
NetDiode1_1: Diode1.1 RDJ2.1 | length 3.1
  Top Layer w0.762: Diode1.1 59.563,13.589 RDJ2.1
NetDiode2_1: Diode2.1 RDJ1.1 | length 2.9
  Top Layer w0.762: Diode2.1 RDJ1.1
NetQ1_3: Q1.3 Q2.3 Q3.3 Q4.3 Q5.3 Q6.3 RJ1.2 | length 34.4
  Top Layer w0.508: RJ1.2 34.098,-12.954 34.61,-12.442 Q2.3 ; 24.003,-13.018 24.003,-12.7 ; 24.003,-12.954 24.958,-11.999 Q6.3 ; 29.145,-12.954 29.53,-12.569 Q4.3
NetRT1_1: RT1.1 TestSpeed.1 | length 60.9
  Top Layer w0.381: RT1.1 -38.354,-6.604 v4(-20.447,11.303)
  Bottom Layer w0.381: v4(-20.447,11.303) -15.367,16.383 -13.716,16.383 -0.127,29.972 TestSpeed.1
PWM1: MCU.103 MOTO.2 | length 4.6
  Top Layer w0.635: MOTO.2 -51.689,-17.653 MCU.103@-51.689,-13.97
PWM2: MCU.101 MOTO.3 | length 4.8
  Top Layer w0.635: MOTO.3 -54.864,-14.224 MCU.101
PWM3: BaiTou.1 MCU.227 | length 117.6
  Bottom Layer w0.381: MCU.227 -59.436,-8.763 -58.039,-10.16 -55.626,-10.16 -39.116,6.35 -14.351,6.35 -7.874,12.827 -7.874,19.304 -5.842,21.336 21.2,21.336 23.994,18.542 38.354,18.542 BaiTou.1
PWM4: MCU.225 ZhuanXian.1 | length 120.1
  Bottom Layer w0.381: MCU.225 -58.166,-4.826 -51.308,-4.826 -39.497,6.985 -15.113,6.985 -8.89,13.208 -8.89,19.939 -6.858,21.971 21.463,21.971 24.13,19.304 41.91,19.304 43.18,18.034 ZhuanXian.1
QVCC: CQ2.1 CQ4.1 CQ6.2 CQ7.2 LM-Other.3 red.2 TestSpeed.2 WireLess-P.1 | length 46.3
  Top Layer w0.762: TestSpeed.2 9.652,27.178 CQ7.2 9.906,26.543 11.303,25.146 16.51,25.146 WireLess-P.1 ; v3(11.049,38.735) 11.049,38.862 v3(13.208,41.021)
  Bottom Layer w0.762: TestSpeed.2 9.652,37.338 v3(11.049,38.735) ; v3(13.208,41.021) 13.716,41.529 CQ2.1@13.716,42.418 ; CQ2.1@13.716,42.164 18.669,42.164 20.32,43.815 red.2 ; 16.637,42.164 19.088,39.713 CQ4.1 20.828,39.624 LM-Other.3 ; red.2@20.066,45.466 CQ6.2
T7: MCU.116 RT1.2 | length 6.4
  Top Layer w0.381: RT1.2 -40.894,-6.731 -36.576,-11.049 MCU.116
V1: Q1.1 ZONG20.19 | length 12.1
  Top Layer w0.381: ZONG20.19 35.416,-3.031 35.814,-3.429 37.084,-3.429 37.846,-4.191 37.846,-9.906 37.526,-10.226 Q1.1
V2: Q2.1 ZONG20.17 | length 6.7
  Top Layer w0.381: ZONG20.17 33.416,-3.561 36.017,-6.162 Q2.1
V3: Q3.1 ZONG20.15 | length 11.1
  Top Layer w0.381: ZONG20.15 31.416,-3.476 33.401,-5.461 33.401,-8.763 31.938,-10.226 Q3.1
V4: Q4.1 ZONG20.5 | length 13.3
  Top Layer w0.381: ZONG20.5 21.416,-3.001 22.606,-4.191 29.083,-4.191 31.054,-6.162 Q4.1
V5: Q5.1 ZONG20.3 | length 17.8
  Top Layer w0.381: ZONG20.3 19.416,-3.922 20.32,-4.826 27.315,-4.826 28.194,-5.705 28.194,-9.398 27.366,-10.226 Q5.1
V6: Q6.1 ZONG20.1 | length 13.1
  Top Layer w0.381: ZONG20.1 17.416,-3.7 19.177,-5.461 25.557,-5.461 26.258,-6.162 Q6.1
pads on no net: LCD.9 LCD.10 MCU.102 MCU.104 MCU.105 MCU.106 MCU.107 MCU.108 MCU.109 MCU.110 MCU.111 MCU.112 MCU.113 MCU.114 MCU.115 MCU.117 MCU.118 MCU.119 MCU.120 MCU.201 MCU.202 MCU.203 MCU.204 MCU.207 MCU.208 MCU.209 MCU.210 MCU.211 MCU.212 MCU.213 MCU.214 MCU.215 MCU.216 MCU.223 MCU.224 MCU.226 MCU.228 MCU.318 MCU.320 MCU.322 MCU.323 MCU.324 MCU.325 MCU.326 MCU.401 MCU.402 MCU.403 MCU.404 MCU.405 MCU.406 MCU.407 MCU.408 MCU.501 MCU.502 MCU.503 MCU.504 MCU.505 MCU.506 MCU.507 MCU.508 TIAOZHI.3

## Keep-outs
Keep-Out Layer:
  lines w0.254: -66,-20 65,-20 65,20 25,20 25,50 -5,50 -5,40 -5,34 -31,34 -31,40 -66,40 -66,-20 ; -6,-5 6,-5 6,20 -6,20 -6,-5

## Silkscreen, mask and mechanical layers (free items; w line width, h text height)
Top Paste:
  lines w0.254: 145.542,-78.867 145.542,78.232 ; 166.878,79.502 -121.92,79.502 -123.698,81.28 -122.174,-83.439 170.942,-83.439